# Altium PCB TempSens.PcbDoc
Units mm, origin at the board's own origin, x right, y up, seen from the top; angles counter-clockwise.
Board outline 6.6 x 6.1 mm, 2 copper layers (Top Layer, Bottom Layer), stack 1.571 mm thick; 4 components, 6 nets, 19 pads, 8 vias.
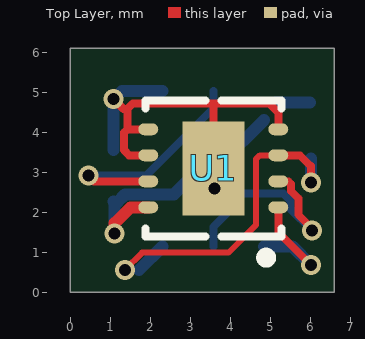
[diagram p0: Top Layer view]
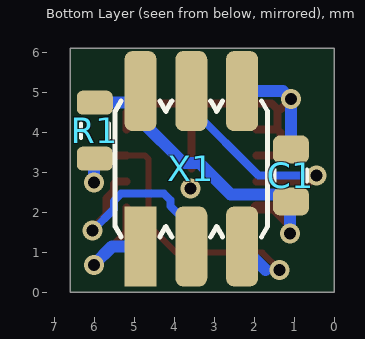
[diagram p1: Bottom Layer view, seen from below]
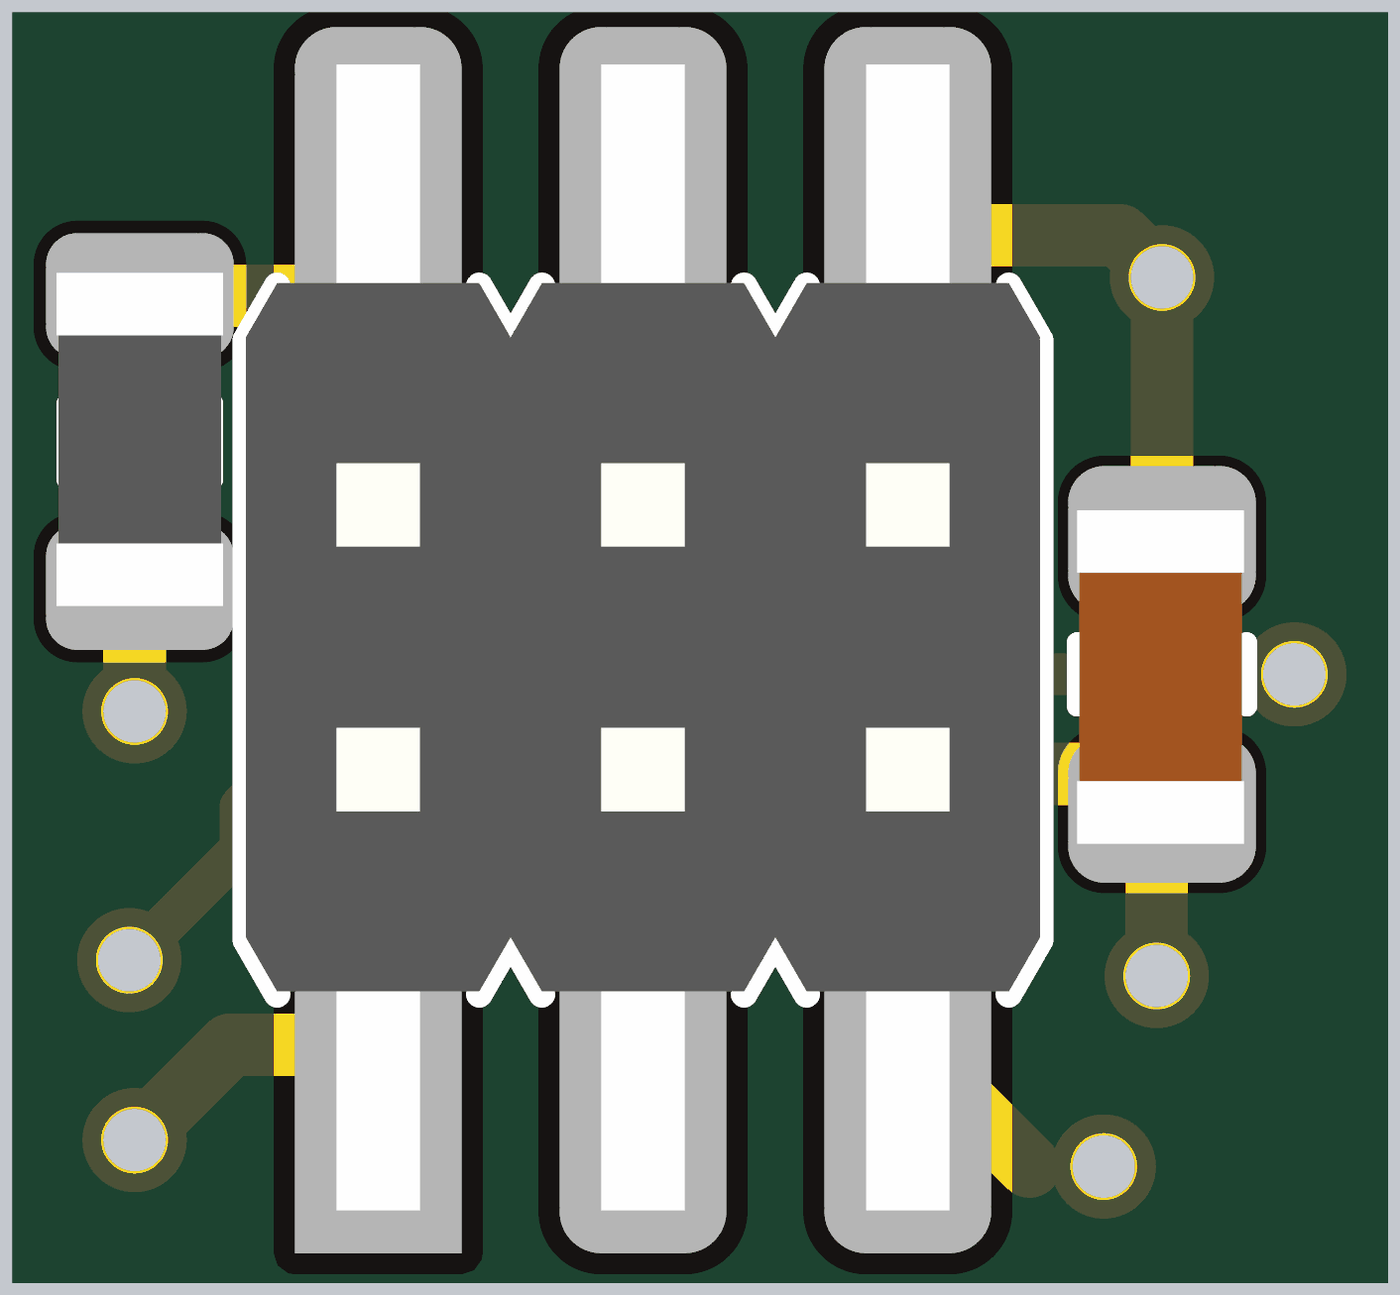
[diagram p2: 3D render of the assembled board from below, using the file's embedded part models]

## Layer stack, top to bottom
Top Layer: signal copper 0.0356
Dielectric: core 1.5, FR-4, Dk 4.8
Bottom Layer: signal copper 0.0356

## Board outline
0,0 0,6.1 6.6,6.1 6.6,0

## Design rules (kind name [scope] priority, off if disabled: settings)
Clearance [All] p1: gap=0.15
MinimumSolderMaskSliver [All] p1: minsoldermaskwidth=0
PolygonConnect [All] p1: connectstyle=Relief reliefconductorwidth=0.254 reliefentries=4 polygonreliefangle="90 Angle" airgapwidth=0.254
RoutingVias [All] p1: holewidth=0.711 width=1.27 viastyle="Through Hole" minholewidth=0.711 minwidth=1.27 maxholewidth=0.711 maxwidth=1.27
SilkToSolderMaskClearance [IsPad] p1: minsilkscreentomaskgap=0 clearancetoexposedcopper=TRUE
SolderMaskExpansion [All] p1: expansion=0.102
Width [All] p1: maxlimit=5 minlimit=0.15 preferedwidth=0.15
26 further rules are at their usual default settings.

## Components (designator, comment, footprint, x,y, rotation, side; value= is the part's Value field where it differs from the comment)
C1 "CL10B104KA8NNND" 1608[0603] 1.085,2.922 r270 bottom
R1 "RJ0603FRE074K7L" 0603 5.988,4.04 r90 bottom
U1 "MAX31725MTA+" "T833-2 Maxim" 3.575,3.1 r180 top
X1 "20021121-00006C4LF" FCI_20021121-00006XXLFc 4.845,1.144 r180 bottom

## Footprints (in the part's own frame and the unit in brackets; to place one, negate y for a bottom-side part, rotate by r counter-clockwise, add the part's x,y. Pads: shape width x height; smd on the part's side, far side on the other; paste and mask are expansions set on the pad)
0603 [mm] "Chip Resistor; Body 1.6 x 0.8 mm (LxW typ)"
  rrect50% 0.6x0.9 smd mask+0.06: 1(-0.7,0) 2(0.7,0)
  silkscreen extent -0.18,-0.35 0.18,0.35, body extent -0.79,-0.4 0.81,0.4, height 0.45
1608[0603] [mm] "Chip Capacitor; Body 1.6 x 0.8 mm (LxW typ)"
  rrect50% 0.7x0.9 smd mask+0.05: 1(-0.65,0) 2(0.65,0)
  silkscreen extent -0.15,-0.41 0.15,0.41, body extent -0.79,-0.41 0.81,0.39, height 0.8
FCI_20021121-00006XXLFc [mm]
  rect 0.8x2 smd: 1(0,0)
  rrect50% 0.8x2 smd: 2(0,3.885) 3(1.27,0) 4(1.27,3.885) 5(2.54,0) 6(2.54,3.885)
  silkscreen extent -0.63,0.24 3.18,3.64, body extent -0.63,-0.79 3.18,4.71, height 4.5
"T833-2 Maxim" [mm] "QFN, 8-Leads, Body 3.00x3.00mm, Pitch 0.65mm, Thermal Pad 1.55x2.35mm, IPC Medium Density"
  oval 0.5x0.3 smd: 1(-1.625,0.975) 2(-1.625,0.325) 3(-1.625,-0.325) 4(-1.625,-0.975) 5(1.625,-0.975) 6(1.625,-0.325) 7(1.625,0.325) 8(1.625,0.975)
  rect 1.55x2.35 smd: 9(0,0)
  silkscreen extent -1.7,-1.7 1.7,2.36, body extent -1.55,-1.55 1.55,1.55, height 0.8

## Part data
C1: library part CVNF100K0603-25, "0.1 uF, 25V, 10% , X7R,  0603 SMD MLC Capacitor"
R1: library part RL0603K004.7-1_1, "4.7 K, 1%, 0603, SMD Resistor, Taped"
U1: "IC TEMP SENSOR 8-TDFN"
X1: "Pin header 2X3, 1.27 mm pitch, SMD"

## Via types
v1: diameter 0.5, hole 0.3, Top Layer to Bottom Layer, tented both sides, 8 vias

## Nets (pads, with @x,y where several pads share a name; then routed paths per layer and width w, separated by ;. In a path a pad name is that pad's centre, name@x,y a point inside that pad or via, vN(x,y) a via of type N, cw(c..) or ccw(c..) an arc to the next point about the centre after c; other vN are vias at no path point)
GND: C1.1 U1.4 U1.5 U1.6 U1.9 X1.6 | length 11.2
  Top Layer w0.2: v1(1.085,4.827) 1.33,4.583 1.425,4.583 ; U1.6 1.472,3.425 1.339,3.557 1.339,3.989 1.425,4.075 ; U1.5 1.425,4.075 ; U1.9 3.575,4.726 ; U1.4 5.2,4.498 4.972,4.726 3.575,4.726 ; 1.425,4.075 1.425,4.583 ; 1.425,4.583 1.568,4.726 3.575,4.726
  Bottom Layer w0.3: C1.1@1.085,3.557 C1.1 v1(1.085,4.827) 1.287,5.029 X1.6
  other v1: 3.6,2.592
NetR1_1: R1.1 U1.3 X1.5 | length 8.7
  Top Layer w0.15: v1(1.365,0.56) 1.797,0.992 3.956,0.992 4.641,1.678 4.641,3.329 4.738,3.425 U1.3
  Top Layer w0.2: U1.3 5.739,3.425 6.013,3.151 v1(6.013,2.744)
  Bottom Layer w0.3: 1.72,0.56 X1.5 ; v1(6.013,2.744) R1.1@6.013,3.34
NetU1_1: U1.1 X1.1 | length 3.1
  Top Layer w0.2: U1.1 5.2,1.5 v1(6.013,0.687)
  Bottom Layer w0.3: X1.1 5.556,1.144 v1(6.013,0.687)
NetU1_2: U1.2 X1.3 | length 5.6
  Top Layer w0.2: U1.2 5.45,2.775 5.513,2.712 5.513,2.537 5.7,2.351 5.7,1.94 6.038,1.601 v1(6.038,1.551)
  Bottom Layer w0.2: X1.3 3.575,1.631 4.1,2.156 4.1,2.305 4.26,2.465 5.327,2.465 5.505,2.287 5.505,2.084 v1(6.038,1.551)
NetU1_7: U1.7 X1.4 | length 5.8
  Top Layer w0.2: v1(0.45,2.922) 0.598,2.775 U1.7
  Bottom Layer w0.2: v1(0.45,2.922) 1.898,2.922 3.575,4.599 X1.4
VDD: C1.2 R1.2 U1.8 X1.2 | length 7.4
  Top Layer w0.3: v1(1.111,1.474) 1.111,1.728 1.507,2.125 U1.8
  Bottom Layer w0.3: C1.2 1.111,2.247 v1(1.111,1.474) ; C1.2@1.174,2.249 1.369,2.444 2.589,2.444 3.38,3.236 3.777,3.236 X1.2@4.845,4.303 ; X1.2@5.134,4.74 R1.2

## Silkscreen, mask and mechanical layers (free items; w line width, h text height)
Mechanical 1:
  the board outline again, w0.1